# Altium PCB OBC_v8.PcbDoc (part 3 of 3)
Units mil, origin at the board's own origin, x right, y up, seen from the top; angles counter-clockwise.
Board outline 3550 x 3775 mil, 6 copper layers (Top Layer, MidLayer1, GND, Power, MidLayer2, Bottom Layer); 109 components, 228 nets, 761 pads, 520 vias.
Unrouted connection lines stored in the file: 5.
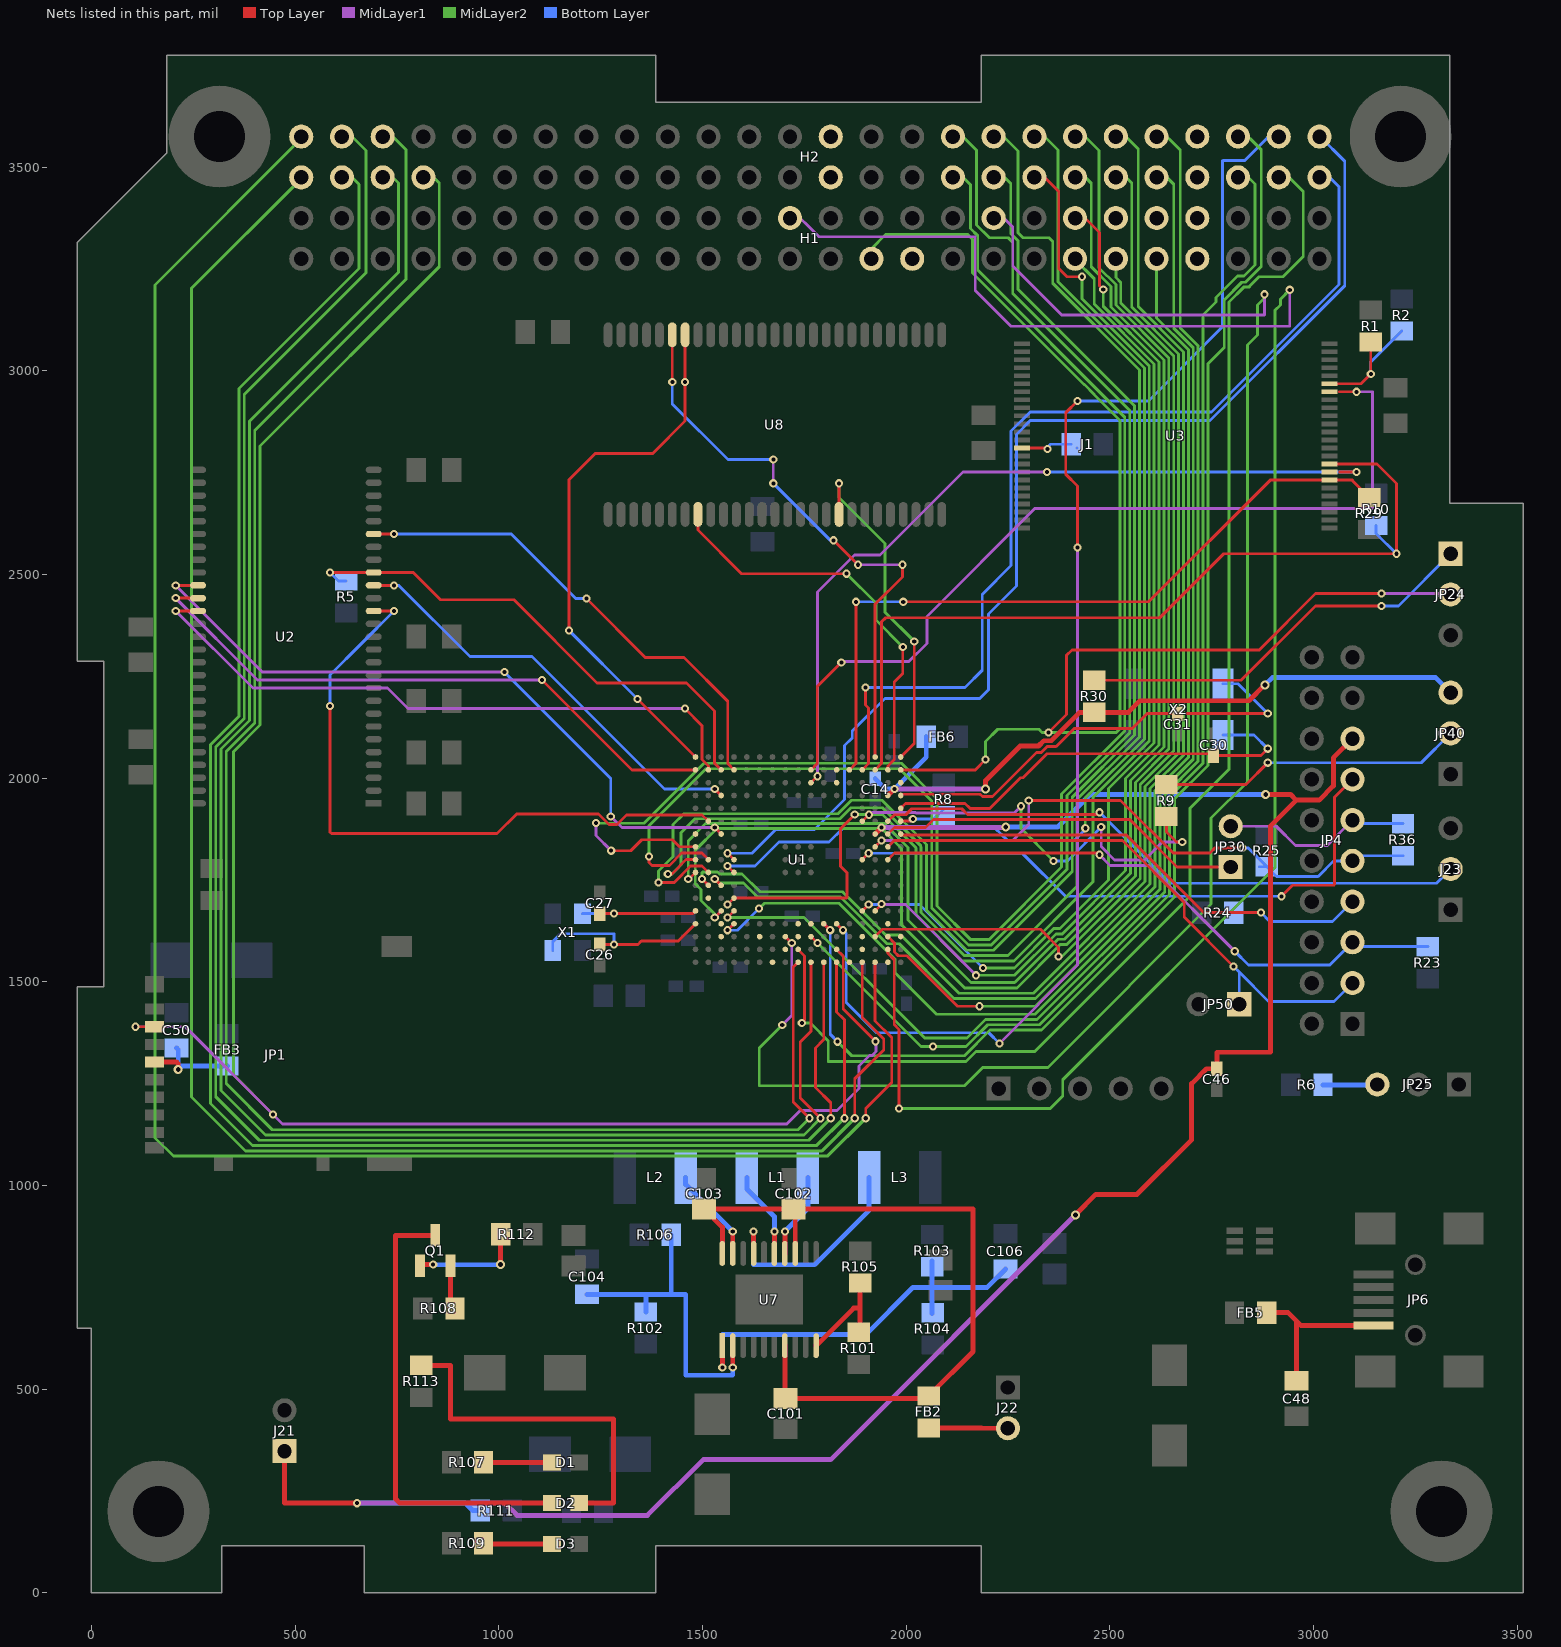
[diagram p7: the nets of this part, all layers, seen from the top]

## Via types
v1: diameter 20, hole 10, Top Layer to Bottom Layer, 405 vias
v2: diameter 22, hole 12, Top Layer to Bottom Layer, 93 vias
v3: diameter 20, hole 10, Top Layer to MidLayer1, 22 vias

## Nets (pads, with @x,y where several pads share a name; then routed paths per layer and width w, separated by ;. In a path a pad name is that pad's centre, name@x,y a point inside that pad or via, vN(x,y) a via of type N, cw(c..) or ccw(c..) an arc to the next point about the centre after c; other vN are vias at no path point) (continued)
IO41: H2.7 JP1.2 U1.T12 | length 4953.1
  Top Layer w7: v1(108,1389.69) JP1.2@155,1389.69 ; U1.T12@1829.49,1579.53 1845.59,1563.42 1845.59,1433 v1(1924.59,1354)
  MidLayer1 w7: v1(108,1389.69) 230.31,1389.69 v1(446,1174) 469,1151 1707,1151 1740,1184 1830,1184 1884.19,1238.19 1884.19,1293.22 1910.47,1319.5 1916.83,1319.5 1926.5,1329.17 1926.5,1352.09 v1(1924.59,1354)
  MidLayer2 w7: v1(446,1174) 348.31,1271.69 348.31,2064.77 414,2130.46 414,2815.57 854.03,3255.6 854.03,3460.97 H2.7@815,3500
IO42: H2.6 U1.U9 | length 4451.3
  Top Layer w7: U1.U9@1735,1548.03 1723,1536.03 1723,1205 v1(1763,1165)
  MidLayer2 w7: H2.6@715,3600 772,3543 772,3225 401,2854 401,2135.85 331,2065.85 331,1250 444,1137 1735,1137 v1(1763,1165)
IO43: H2.5 U1.U10 | length 4412.6
  Top Layer w7: U1.U10@1766.5,1548.03 1766.5,1378.5 1740,1352 1740,1215 v1(1790,1165)
  MidLayer2 w7: H2.5@715,3500 754.03,3460.97 754.03,3242.22 388,2876.19 388,2141.23 318,2071.23 318,1233 427,1124 1749,1124 v1(1790,1165)
IO44: H2.4 U1.U11 | length 4543
  Top Layer w7: U1.U11@1797.99,1548.03 1797.99,1358.33 1777.5,1337.83 1777.5,1240.5 1815,1203 v1(1815,1165)
  MidLayer2 w7: H2.4@615,3600 674,3541 674,3241 375,2942 375,2146.62 305,2076.62 305,1218 412,1111 1761,1111 v1(1815,1165)
IO45: H2.3 U1.U12 | length 4580.2
  Top Layer w7: U1.U12@1829.49,1548.03 1829.49,1426 1848.5,1406.99 v1(1848.5,1165)
  MidLayer2 w7: H2.3@615,3500 657,3458 657,3251.49 362,2956.49 362,2152 292,2082 292,1201 395,1098 1779.5,1098 ; v1@1846.5,1165 1779.5,1098 ; v1(1848.5,1165) 1781.5,1098 1779.5,1098
IO46: H2.2 U1.U15 | length 4991.8
  Top Layer w7: v1(1901,1165) 1901,1189 1964.97,1252.97 1964.97,1363.03 1923.98,1404.02 U1.U15@1923.98,1548.03
  MidLayer2 w7: H2.2@515,3600 515,3570.12 156.09,3211.21 156.09,1116.91 201,1072 1806,1072 ; v1@1899,1165 1806,1072 ; v1(1901,1165) 1808,1072 1806,1072
IO47: H2.1 U1.U14 | length 4657.6
  Top Layer w7: v1(1874,1165) 1874,1262 1945,1333 1945,1360 1892.48,1412.52 U1.U14@1892.48,1548.03
  MidLayer2 w7: H2.1@515,3500 515,3471.69 246,3202.69 246,1217 378,1085 1792,1085 ; v1@1872,1165 1792,1085 ; v1(1874,1165) 1794,1085 1792,1085
JTAGSEL: J23.2 U1.F16 | length 1489.2
  Top Layer w7: U1.F16@1955.47,1894.49 1971.22,1910.24 1999.24,1910.24 2014,1925 2136.5,1925 2151,1910.5 2469.26,1910.5 v1(2475,1916.24)
  Bottom Layer w7: v1(2475,1916.24) 2649.26,1741.97 3301.97,1741.97 J23.2@3337,1777
LED0: 
LED1: 
NANDOE: U1.C10 U3.8 | length 1962.6
  Top Layer w7: U1.C10@1766.5,1988.98 v1(1782.24,2004.72) ; 3064,2751.8 v1(3106,2751.8)
  MidLayer1 w7: v1(1782.24,2004.72) 1782.24,2457.24 1873,2548 1936.2,2548 2140,2751.8 v1(2345.85,2751.8)
  Bottom Layer w7: v1(2345.85,2751.8) v1(3106,2751.8)
NANDWE: U1.B10 U3.18 | length 2161.8
  Top Layer w7: U1.B10@1766.5,2020.47 1782,2035.98 1782,2225 v1(1841,2284) ; 3064,2948.65 v1(3106,2948.65)
  MidLayer1 w7: v1(1841,2284) 1843.5,2286.5 2006.5,2286.5 2051,2331 2051,2397 2316,2662 3145,2662 3145.35,2662.35 3145.35,2948.65 v1(3106,2948.65)
NBS1: U1.B2 U2.39 | length 1578
  Top Layer w7: v1(207,2410.44) U2.39@261.5,2410.44 ; v1(1457,2171) 1499.14,2128.86 1499.14,2045.59 1514.53,2030.2 U1.B2@1514.53,2020.47
  MidLayer1 w7: v1(207,2410.44) 396.44,2221 727.13,2221 777.13,2171 v1(1457,2171)
NBS3: U1.A1 U8.48 | length 1366.2
  Top Layer w7: v1(1172,2363) 1172,2732 1237,2797 1378,2797 1457.53,2876.53 v1(1457.53,2972.44) U8.48@1457.53,3088.47 ; v1(1341,2194) U1.A1@1483.03,2051.97
  Bottom Layer w7: v1(1172,2363) v1(1341,2194)
NetC34_2: 
NetC48_2: C48.2 FB5.2 JP6.1 | length 434.4
  Top Layer w12: FB5.2@2873.59,688 2938,688 2959,667 ; C48.2@2959,520.31 2959,667 ; JP6.1@3148,656 2970,656 2959,667
NetC50_2: C50.2 FB3.1 JP1.4 | length 252.7
  Top Layer w12: JP1.4@155,1303.08 209,1303.08 213,1299.08 v2(213,1285)
  Bottom Layer w12: C50.2@209,1337.69 213,1333.69 v2(213,1285) 221.63,1293.63 FB3.1@334,1293.63
NetC56_2: 
NetC57_2: 
NetC101_1: C101.1 C102.1 C103.1 FB2.2 U7.7 U7.13 U7.20 | length 1860.2
  Top Layer w12: U7.20@1548.84,833.19 1548.84,897.76 C103.1@1504,942.6 C102.1@1724,942.6 2164.41,942.6 2164.41,591.78 FB2.2@2056,483.37 2050.03,477.4 C101.1@1704,477.4 ; C101.1@1702.39,499.02 U7.7@1702.39,606.81 ; U7.13@1727.98,833.19 C102.1@1727.98,938.62
NetC104_1: C104.1 R102.2 R106.1 U7.2 | length 817.8
  Top Layer w12: v1(1574.43,553) U7.2@1574.43,606.81
  Bottom Layer w12: C104.1@1217,732.69 1361,732.69 ; R102.2@1361,689.37 1361,732.69 ; R106.1@1423.37,879 1423.37,733.32 1424,732.69 ; v1(1574.43,553) 1574.43,535 1573.43,534 1459,534 1459,732 1458.31,732.69 1424,732.69 ; 1361,732.69 1424,732.69
NetC106_1: C106.1 R103.1 R104.2 U7.1 | length 1025.3
  Top Layer w12: v1(1548.84,553) U7.1@1548.84,606.81
  Bottom Layer w12: v1(1548.84,553) 1548.84,634 1901,634 2017,750 2064,750 ; R104.2@2064,685.59 2064,750 ; R103.1@2064,814.41 R103.1@2064,800.63 2064,750 ; C106.1@2244,794.67 2199.33,750 2064,750
NetD1_2: D1.2 R107.2 | length 168.2
  Top Layer w12: R107.2@962.37,320 D1.2@1130.54,320
NetD2_1: D2.1 R113.1 | length 893.7
  Top Layer w12: R113.1@810,558.37 881.03,558.37 ; 881.4,558.37 881.4,426.4 1281.6,426.4 1281.6,220 D2.1@1197.46,220
NetD2_2: D2.2 Q1.3 | length 1132.9
  Top Layer w12: Q1.3@844,877.4 746.4,877.4 746.4,230.6 757,220 D2.2@1130.54,220
NetD3_2: D3.2 R109.2 | length 168.2
  Top Layer w12: R109.2@962.37,120 D3.2@1130.54,120
NetFB2_1: FB2.1 J22.2 | length 193.4
  Top Layer w12: FB2.1@2056,404.63 2184.96,404.63 ; 2185.59,404 J22.2@2250,404
NetJ1_1: J1.1 U3.38 | length 131.6
  Top Layer w7: U3.38@2284.09,2810.85 2345.85,2810.85 2347.5,2809.2 v1(2347.5,2808.37)
  Bottom Layer w7: v1(2347.5,2808.37) 2347.5,2809.2 2345.85,2810.85 2354.85,2819.85 J1.1@2405.63,2819.85
NetJP3_10: 
NetJP3_11: 
NetJP4_11: JP4.11 JP30.2 R36.1 | length 471.7
  MidLayer1 w7: JP30.2@2797,1882 2909.03,1882 2956,1835.03 3034.03,1835.03 JP4.11@3096,1897
  Bottom Layer w7: JP4.11@3096,1897 3104.63,1888.37 R36.1@3220,1888.37
NetJP24_1: JP24.1 R30.1 | length 1003.7
  Top Layer w7: R30.1@2462,2240.37 2822.37,2240.37 3005,2423 v1(3167,2423)
  Bottom Layer w7: v1(3167,2423) 3209,2423 JP24.1@3337,2551
NetJP25_3: JP25.3 R6.2 | length 132.6
  Bottom Layer w12: R6.2@3023.37,1247 JP25.3@3156,1247
NetJP40_2: JP40.2 R9.1 | length 750
  Top Layer w7: R9.1@2639,1984.37 2834.37,1984.37 v1(2888,2038)
  Bottom Layer w7: v1(2888,2038) 3265,2038 JP40.2@3337,2110
NetL1_1: L1.1 U7.14 | length 210.2
  Top Layer w12: U7.14@1702.39,833.19 v1(1702.39,887)
  Bottom Layer w12: v1(1702.39,887) 1758.8,943.42 L1.1@1758.8,1020
NetL1_2: L1.2 U7.15 | length 214.8
  Top Layer w12: U7.15@1676.8,833.19 v1(1676.8,887)
  Bottom Layer w12: L1.2@1609.2,1020 1609.2,991.39 1676.8,923.8 v1(1676.8,887)
NetL2_1: L2.1 U7.19 | length 234.7
  Top Layer w12: U7.19@1574.43,833.19 v1(1574.43,887)
  Bottom Layer w12: L2.1@1458.8,1020 1458.8,1002.63 v1(1574.43,887)
NetL3_1: L3.1 U7.17 | length 555.2
  Top Layer w12: U7.17@1625.61,833.19 v1(1625.61,887)
  Bottom Layer w12: v1(1625.61,887) 1625.61,805.39 1775.39,805.39 1909.2,939.2 L3.1@1909.2,1020
NetQ1_1: Q1.1 R112.2 | length 274.4
  Top Layer w12: Q1.1@806.6,802.6 810,806 v1(839,806) ; v2(1004.63,805.63) R112.2@1004.63,880
  Bottom Layer w12: v1(839,806) 840,805 840.41,805.41 v2@1004.63,805.41
NetQ1_2: Q1.2 R108.2 | length 88.7
  Top Layer w12: Q1.2@881.4,802.6 881.4,714.19 R108.2@881.59,714
NetR1_2: R1.2 R2.2 U3.19 | length 326
  Top Layer w7: U3.19@3040,2968.33 3117,2968.33 v1(3141,2992.33) R1.2@3141,3070.63
  Bottom Layer w7: v1(3141,2992.33) 3141,3021.63 R2.2@3217,3097.63
NetR101_2: R101.2 R105.1 U7.10 | length 291.8
  Top Layer w12: U7.10@1779.16,606.81 1871.35,699 1887,699 ; R101.2@1887,628.59 1887,699 ; R105.1@1887,774.41 1887,699
NRST: C46.2 J21.1 JP4.15 R111.1 U1.G15 | length 5412.1
  Top Layer w12: J21.1@474,348 474,220.87 474.87,220 v1(652,220) ; U1.G15@1923.98,1862.99 v3(1939.72,1878.74) ; v2(2416,928) 2466,978 2567,978 2701,1112 2701,1250 2737.59,1286.59 C46.2@2763,1286.59 2763,1327 2895,1327 2895,1883 2958,1946 ; v2(2883,1960) 2944,1960 2958,1946 ; JP4.15@3096,2097 3049,2050 3049,1981 3014,1946 2958,1946
  MidLayer1 w12: v1(652,220) 1015,220 1045,190 1365,190 1502,327 1815,327 v2(2416,928) ; v3(1939.72,1878.74) v2@2244.74,1878.74
  Bottom Layer w12: v1(652,220) 918,220 936,202 R111.1@954.63,202 ; v2(2244.74,1879.74) 2371.74,1879.74 2452,1960 v2(2883,1960)
NTRST: JP4.3 JP50.1 U1.H16 | length 1429.3
  Top Layer w7: U1.H16@1955.47,1831.5 1970.98,1847 2531,1847 2683,1695 2683,1659 v1(2804,1538)
  Bottom Layer w7: v1(2804,1538) 2818,1524 ; JP50.1@2818,1445 2818,1524 ; JP4.3@3096,1497 3051,1452 2890,1452 2818,1524
"OFF VCC": H1.31
OSCSEL: R9.2 U1.F14 | length 1090.3
  Top Layer w7: U1.F14@1892.48,1894.49 1892.98,1894.49 v3(1908.73,1910.24) ; R9.2@2639,1905.63 2639,1868 2664,1843 v1(2678,1843)
  MidLayer1 w7: v3(1908.73,1910.24) 1914.48,1915.99 2023.32,1915.99 2024.81,1914.5 2265.5,1914.5 v1(2282,1931) ; v1(2479,1880) 2479,1832 2512,1799 2585,1799 2629,1843 v1(2678,1843)
  MidLayer2 w7: v1(2282,1931) 2282,1877 v1(2362,1797)
  Bottom Layer w7: v1(2362,1797) 2396,1797 v1(2479,1880)
PA0: H2.47 U1.R10 | length 3045.9
  Top Layer w7: U1.R10@1766.5,1611.02 v1(1782.24,1595.28)
  MidLayer2 w7: v1(1782.24,1595.28) 2036.52,1341 v1(2066,1341) 2147.2,1341 2200.7,1394.5 2327.19,1394.5 2647,1714.31 2647,1771.08 2647,1954.5 2729,2036.5 2729,3137.46 2760.88,3169.34 2760.88,3180.17 2813.8,3233.09 2829.55,3233.09 2856.5,3260.04 2856.5,3458.5 H2.47@2815,3500
PA1: H2.48 U1.P11 | length 3315.7
  Top Layer w7: U1.P11@1797.99,1642.52 v1(1813.74,1626.77)
  MidLayer2 w7: v1(1832,1353) 1866.5,1318.5 2143.09,1318.5 2206.09,1381.5 2332.58,1381.5 2659.04,1707.96 2659,1708 2659,1776.05 2659,1949.53 2741,2031.53 2741,3017.57 2781,3057.57 2781,3174.31 2824.19,3217.5 2833.64,3217.5 2872,3255.86 2872,3543 H2.48@2815,3600
  Bottom Layer w7: v1(1813.74,1626.77) 1813.74,1371.26 v1(1832,1353)
PA2: H2.49 U1.T9 | length 3352.3
  Top Layer w7: U1.T9@1735,1579.53 1751,1563.53 1751,1406 v1(1744,1399)
  MidLayer2 w7: v1(1744,1399) 1765,1399 1809,1355 1809,1304 2146.97,1304 2172,1329.03 2316.03,1329.03 2697,1710 2697,1926 2793,2022 2793,3169.33 2829.17,3205.5 2842.31,3205.5 2843.5,3206.69 2843.5,3207.83 2866.67,3231 2925,3231 2975,3281 2975,3440 H2.49@2915,3500
PA3: H2.50 U1.P12 | length 3313.2
  Top Layer w7: U1.P12@1829.49,1642.52 v1(1845.24,1626.77) ; v1(2421,2566) 2421,2717 2392,2746 2392,2897 v1(2421,2926)
  MidLayer1 w7: v1(2229,1349) 2421,1541 v1(2421,2566)
  Bottom Layer w7: v1(1845.24,1626.77) 1853,1619.01 1853,1449 1927,1375 2203,1375 v1(2229,1349) ; v1(2421,2926) 2594.78,2926 2776.97,3108.19 2776.97,3515.75 2777.78,3516.56 2831.56,3516.56 H2.50@2915,3600
PA18: U1.U16
PA19: U1.U13
PA20: U1.T14
PA21: U1.R14 | length 0
PA22: H1.26 U1.T16 | length 4540.5
  Top Layer w7: U1.T16@1955.47,1579.53 1955.47,1569.8 1970.86,1554.41 1970.86,1394.86 1983,1382.72 v1(1983,1189)
  MidLayer1 w7: H1.26@1715,3400 1785.83,3329.17 2170,3329.17 2170,3197.38 2257.88,3109.5 2942,3109.5 v1(2942,3199)
  MidLayer2 w7: v1(1983,1189) 2354,1189 2384.54,1219.54 2384.54,1259.54 2906,1781 2906,3149 2919,3162 2919,3176 v1(2942,3199)
PA23: H1.41 U1.R15 | length 2417.8
  Top Layer w7: U1.R15@1923.98,1611.02 1941.89,1628.94 2329.71,1628.94 2374,1584.65 v1(2374,1562)
  MidLayer2 w7: v1(2374,1562) 2383.15,1562 2575,1753.85 2575,1984.32 2657,2066.32 2657,3036.76 2527,3166.76 2527,3216.94 2515,3228.94 H1.41@2515,3300
PA24: H1.43 U1.R16 | length 2493.5
  Top Layer w7: U1.R16@1955.47,1611.02 1971.58,1594.92 1971.58,1573.15 1980.59,1564.14 2002.36,1564.14 2126.5,1440 v1(2180,1440)
  MidLayer2 w7: v1(2180,1440) 2317.54,1440 2611,1733.46 2611,1756.17 2611,1969.41 2693,2051.41 2693,3051.68 2615,3129.68 H1.43@2615,3300
PA25: U1.P16
PA29: U1.R17
PA30: H1.40 U1.N15 | length 2546.3
  Top Layer w7: U1.N15@1923.98,1674.02 v3@1939.72,1689.76 ; H1.40@2415,3400 2475,3340 2475,3209 v1(2484,3200)
  MidLayer1 w7: v3@1939.72,1689.76 1998.24,1689.76 v1(2172,1516)
  MidLayer2 w7: v1(2172,1516) 2266.23,1516 2367.85,1617.62 2383.61,1617.62 2539,1773 2539,1999.23 2621,2081.24 2621,3021.85 2484,3158.85 v1(2484,3200)
  other v3: 1939.72,1690.76
PA31: H1.39 U1.N14 | length 2442.1
  Top Layer w7: U1.N14@1892.48,1674.02 v1(1908.23,1689.76)
  MidLayer2 w7: v1(2189,1534) 2265.85,1534 2362.46,1630.62 2378.23,1630.62 2497.31,1749.69 2497.31,1974.51 2609,2086.21 2609,3016.88 2462,3163.88 2462,3226 2415,3273 H1.39@2415,3300
  Bottom Layer w7: v1(1908.23,1689.76) 2033.24,1689.76 v1(2189,1534)
PB23: U1.R6 | length 0
PB25: U1.U7
PB26: H1.36 U1.R8 | length 4131.1
  Top Layer w7: U1.R8@1703.5,1611.02 v1(1719.25,1595.28)
  MidLayer1 w7: v1(1696,1394) 1719.25,1417.25 v1(1719.25,1595.28) ; H1.36@2215,3400 2262,3353 2262,3257.69 2382.19,3137.5 2880,3137.5 v1(2880,3188)
  MidLayer2 w7: v1(1696,1394) 1639.5,1337.5 1639.5,1245 2143.13,1245 2188.15,1290.03 2348.03,1290.03 2749,1691 2749,1902 2838,1991 2838,3063.66 2862.75,3088.42 2862.75,3161.75 2880,3179 v1(2880,3188)
PB28: U1.R9
PB29: U1.T8
PB30: U1.P9
PB31: U1.P10
PC4: U1.A17 U8.19 | length 838.6
  Top Layer w7: U8.19@1835.48,2647.53 v1(1835.48,2724) ; U1.A17@1986.97,2051.97 2020,2085 v1(2020,2336)
  MidLayer2 w7: v1(1835.48,2724) 1835.48,2689 1948.48,2576 1948.48,2407.52 v1(2020,2336)
PC5: U1.A15 U8.49 | length 1432.1
  Top Layer w7: v1(1426.03,2972.44) U8.49@1426.03,3088.47 ; v1(1822,2584) v3(1882,2524) ; U1.A15@1923.98,2051.97 1923.98,2426.98 1991.14,2494.14 ; 1991,2494.28 v1(1991,2524)
  MidLayer1 w7: v1(1674,2724) v1(1674,2782) ; v3(1882,2524) v1(1991,2524)
  Bottom Layer w7: v1(1426.03,2972.44) 1426.03,2918.46 1562.49,2782 v1(1674,2782) ; v1(1674,2724) 1814,2584 v1(1822,2584)
PC8: U1.B16 U8.8 | length 999.7
  Top Layer w7: U8.8@1489.02,2647.53 1489.02,2608.98 1596,2502 1655,2502 ; 1657,2502 v1(1854,2502) ; U1.B16@1955.47,2020.47 1955.47,2030.2 1970.86,2045.59 1970.86,2236 1992,2257.14 v1(1992,2322)
  MidLayer2 w7: v1(1854,2502) 1926,2430 1926,2388 v1(1992,2322)
PC10: U1.B12
PC11: H2.51 U1.B14 | length 2395.1
  Top Layer w7: U1.B14@1892.48,2020.47 1908,2035.99 1908,2172 1900,2180 v1(1900,2223)
  Bottom Layer w7: v1(1900,2223) 2145,2223 2187,2265 2187,2451 2258,2522 2258,2852 2305,2899 2750.03,2899 3063,3211.97 3063,3452 H2.51@3015,3500
PC12: U1.C12 | length 0
PC13: R29.2 U1.B13 U3.7 | length 1820.5
  Top Layer w7: U1.B13@1860.98,2020.47 1877,2036.49 v1(1877,2433) ; v1@1994.59,2433 2595.59,2433 2894.11,2731.52 2894.11,2732.11 U3.7@3040,2732.11 3096,2732.11 3096,2730.37 R29.2@3137,2689.37
  Bottom Layer w7: v1(1877,2433) v1(1993,2433)
PC14: R10.2 U1.B15 U3.9 | length 2150
  Top Layer w7: U1.B15@1923.98,2020.47 1940,2036.5 1940,2384 1950,2394 2623,2394 2780,2551 v1(3204,2551) 3204,2723.41 3155.93,2771.48 U3.9@3040,2771.48
  Bottom Layer w7: R10.2@3154,2620.63 3154,2601 v1(3204,2551)
PC15: U1.G1
PC16: H2.52 U1.J4 | length 2945.4
  Top Layer w7: v1(1561.77,1815.75) U1.J4@1577.52,1800
  Bottom Layer w7: v1(1561.77,1815.75) 1621.75,1815.75 1680,1874 1775,1874 1849,1948 1849,2080 1868,2099 1868,2116 1948,2196 2181,2196 2202,2217 2202,2403 2271,2472 2271,2844 2305,2878 2746,2878 3077,3209 3077,3514.54 3015,3576.54 H2.52@3015,3600
PC17: H2.34 U1.J2 | length 3845.9
  Top Layer w7: v1(1369,1808) 1369,1793 1376,1786 1419,1786 1449,1816 1498.53,1816 U1.J2@1514.53,1800
  MidLayer2 w7: v1(1369,1808) 1369,1883.33 1508.85,2023.17 1983.44,2023.17 2063,1943.62 2063,1681.08 2153.58,1590.5 2209.12,1590.5 2395,1776.38 2395,1957.06 2549,2111.06 2549,2902.77 2262,3189.77 2262,3315.52 2250.75,3326.77 2204.72,3326.77 2173.23,3358.27 2173.23,3541.77 H2.34@2115,3600
PC18: H2.33 U1.H1 | length 3877.2
  Top Layer w7: v1(1276,1822) 1324,1822 1351,1849 1426.5,1849 1444,1831.5 U1.H1@1483.03,1831.5
  MidLayer1 w7: v1(1239,1890) 1239,1859 v1(1276,1822)
  MidLayer2 w7: v1(1239,1890) 1239.5,1889.5 1356.79,1889.5 1503.88,2036.59 1988.41,2036.59 2076,1949 2076,1686.46 2158.96,1603.5 2203.73,1603.5 2382,1781.77 2382,1961.03 2537,2116.03 2537,2886.23 2175.97,3247.26 2175.97,3331.9 2158,3349.87 2158,3457 H2.33@2115,3500
PC19: H2.36 U1.J1 | length 3631.6
  Top Layer w7: v1(1415,1765) 1425,1765 1460,1800 U1.J1@1483.03,1800
  MidLayer2 w7: v1(1415,1765) 1425,1765 1447,1787 1447,1866 1481.5,1900.5 1837.76,1900.5 1864.76,1927.5 1942.47,1927.5 2036,1833.97 2036,1832 2037,1831 2037,1670.31 2142.81,1564.5 2249.83,1564.5 2420,1734.67 2420,1948.12 2573,2101.12 2573,3001.97 2360,3214.97 2360,3318 2351.23,3326.77 2287.4,3326.77 2275,3339.17 2275,3540 H2.36@2215,3600
PC20: H2.35 U1.K2 | length 3569.2
  Top Layer w7: v1(1392,1744) 1431,1744 1471,1784 1499.03,1784 U1.K2@1514.53,1768.5
  MidLayer2 w7: v1(1392,1744) 1392,1772 1428,1808 1428,1886 1454.5,1912.5 1832.77,1912.5 1866,1945.73 1941.27,1945.73 2050,1837 2050,1675.69 2148.19,1577.5 2214.5,1577.5 2408,1771 2408,1953.09 2561,2106.09 2561,2914.39 2275,3200.39 2275,3319.49 2257,3337.49 2257,3459.97 H2.35@2216.97,3500
PC21: H2.38 U1.K4 | length 3161
  Top Layer w7: v1(1561.77,1784.25) U1.K4@1577.52,1768.5
  MidLayer2 w7: H2.38@2315,3600 2373,3542 2373,3218.94 2585,3006.94 2585,2096.15 2440,1951.15 v1(2440,1877) v1@2440,1874
  Bottom Layer w7: v1(1561.77,1784.25) 1629.25,1784.25 1688,1843 1811,1843 1844,1876 1958,1876 ; 2233.25,1862.74 2219.99,1876 1958,1876 ; 2235,1861.24 2249.49,1846.75 ; v1@2440,1874 2412.75,1846.75 2249.49,1846.75 ; 1958,1876 1987.25,1846.75 2249.49,1846.75
PC22: H2.37 U1.M4 | length 3385.5
  Top Layer w7: v1(1561.77,1689.76) U1.M4@1577.52,1705.51 1853,1705.51 1854.74,1707.26 1854.74,1768 1839,1783.74 1839,1876 v1(1874,1911) ; H2.37@2315,3500 2375,3440 2375,3250.98 2394.98,3231 v1(2432,3231)
  MidLayer2 w7: v1(1874,1911) 1942,1911 2024,1829 2024,1664.92 2137.42,1551.5 2264.96,1551.5 2458.5,1745.04 2458.5,1952.68 2597,2091.18 2597,3011.91 2432,3176.91 v1(2432,3231)
PC23: H2.40 U1.N3 | length 3664.8
  Top Layer w7: v1(1530.28,1658.27) U1.N3@1546.02,1674.02
  MidLayer2 w7: v1(1530.28,1658.27) 1530.28,1666.43 1496.71,1700 1496.71,1726.57 1482.28,1741 1482.28,1823 1535.78,1876.5 1940.12,1876.5 1989,1827.62 1989,1640 2144,1485 2272,1485 2378.62,1591.62 2394.38,1591.62 2563,1760.23 2563,1989.29 2645,2071.3 2645,3031.79 2515,3161.79 2515,3211.97 2474,3252.97 2474,3541 H2.40@2415,3600
PC24: H2.39 U1.K1 | length 3455.8
  Top Layer w7: v1(1465.28,1752.76) 1467.28,1752.76 U1.K1@1483.03,1768.5
  MidLayer2 w7: v1(1465.28,1752.76) 1465.28,1846 1507.78,1888.5 1946.5,1888.5 2005,1830 2005,1652 2159,1498 2266.62,1498 2373.23,1604.62 2389,1604.62 2551,1766.62 2551,1994.26 2633,2076.27 2633,3026.82 2503,3156.82 2503,3207 2454.5,3255.5 2454.5,3460.5 H2.39@2415,3500
PC25: H2.42 U1.L3 | length 3291.9
  Top Layer w7: v1(1530.28,1752.76) U1.L3@1546.02,1737.01
  MidLayer2 w7: v1(1530.28,1752.76) 1540.02,1743.02 1600.6,1743.02 1635.62,1708 1838.64,1708 1953,1593.64 1983.36,1593.64 2118,1459 2318.15,1459 2599,1739.85 2599,1751.2 2599,1974.38 2681,2056.38 2681,3046.7 2570,3157.7 2570,3545 H2.42@2515,3600
PC26: H2.41 U1.L2 | length 3214.9
  Top Layer w7: v1@1498.54,1753 v1(1498.78,1752.76) U1.L2@1514.53,1737.01
  MidLayer2 w7: v1(1498.78,1752.76) 1498.78,1768.04 1500,1769.26 1537.11,1769.26 1541.61,1764.76 1597.24,1764.76 1641,1721 1844.02,1721 1950,1615.02 1986.98,1615.02 2130,1472 2312.77,1472 2587,1746.23 2587,1979.35 2669,2061.35 2669,3041.73 2554.03,3156.71 2554.03,3460.97 H2.41@2515,3500
PC27: H2.44 U1.N4 | length 3322.3
  Top Layer w7: v1(1561.77,1658.27) U1.N4@1577.52,1674.02
  MidLayer2 w7: v1(1561.77,1658.27) 1749.73,1658.27 2046,1362 2149.5,1362 2195,1407.5 2321.81,1407.5 2635,1720.69 2635,1766.11 2635,1959.47 2717,2041.47 2717,3061.62 2673,3105.62 2673,3542 H2.44@2615,3600
PC28: H2.43 U1.P4 | length 3214.4
  Top Layer w7: v1(1561.77,1626.77) U1.P4@1577.52,1642.52
  MidLayer2 w7: v1(1639,1680) 1652,1693 1835.25,1693 1973.25,1555 1973.25,1521.75 2074.5,1420.5 2316.42,1420.5 2623,1727.08 2623,1761.14 2623,1964.44 2705,2046.44 2705,3056.65 2657,3104.65 2657,3458 H2.43@2615,3500
  Bottom Layer w7: v1(1561.77,1626.77) 1585.77,1626.77 v1(1639,1680)
PC29: U1.R3
PC30: U1.P3
PC31: U1.M2
RAS: U1.D3 U2.18 | length 1066.7
  Top Layer w7: U2.18@693,2473.43 v1(743,2473.43) ; v1(1530.28,1973.23) U1.D3@1546.02,1957.48
  Bottom Layer w7: v1(743,2473.43) 754.57,2473.43 929.59,2298.41 1081.59,2298.41 1406.77,1973.23 v1(1530.28,1973.23)
RD+: 
RD-: 
REXT: 
RSVD0: H1.44
RSVD1: H1.45
RSVD2: H1.46
RTCK: JP30.1 U1.G16 | length 904.5
  Top Layer w7: U1.G16@1955.47,1862.99 1971.48,1879 2048,1879 2067.5,1898.5 2549,1898.5 2665.5,1782 JP30.1@2797,1782
SDA10: U1.B4 U2.22 | length 1214
  Top Layer w7: U2.22@693,2599.42 v1(743,2599.42) ; v1(1215,2441) 1359.73,2296.27 1454.73,2296.27 1562.13,2188.87 1562.13,2035.86 U1.B4@1577.52,2020.47
  Bottom Layer w7: v1(743,2599.42) 1030.58,2599.42 1189,2441 v1(1215,2441)
SDCK: U1.B1 U2.38 | length 1503.4
  Top Layer w7: v1(207,2441.94) U2.38@261.5,2441.94 ; v1(1106,2241) 1106.34,2241 1326.86,2020.47 ; 1328.53,2020.47 U1.B1@1483.03,2020.47
  MidLayer1 w7: v1(207,2441.94) 407.94,2241 v1(1106,2241)
SDCKE: U1.G3 U2.37 | length 1701.2
  Top Layer w7: v1(207,2473.43) U2.37@261.5,2473.43 ; v3(1530.28,1878.74) U1.G3@1546.02,1862.99
  MidLayer1 w7: v1(207,2473.43) 419.43,2261 v1(1014,2261) ; v1(1275,1906) 1302.26,1878.74 v3(1530.28,1878.74)
  Bottom Layer w7: v1@1013.5,2260.5 1275,1999 v1(1275,1906)
SDCS: R5.2 U1.B3 U2.19 | length 1284.6
  Top Layer w7: v1(585.9,2504.93) 790.07,2504.93 857,2438 1037,2438 1241.12,2233.88 1461.12,2233.88 1530,2165 1530,2036.5 U1.B3@1546.02,2020.47
  Bottom Layer w7: v1(585.9,2504.93) 606.46,2484.37 R5.2@625,2484.37 ; R5.2@625,2505.59 R5.2@625.66,2504.93
SDWE: U1.F2 U2.16 | length 1635.3
  Top Layer w7: v1(585.9,2177) 585.9,1867.1 589,1864 996,1864 1044,1912 1245,1912 1271,1886 1290,1886 1314,1910 1499.02,1910 U1.F2@1514.53,1894.49 ; U2.16@693,2410.44 v1(743,2410.44)
  Bottom Layer w7: v1(585.9,2177) 585.9,2253.34 662.56,2330 v1(743,2410.44)
SHDN: U1.C17
TCK: JP4.9 R25.1 R36.2 U1.H15 | length 1505.3
  Top Layer w7: U1.H15@1923.98,1831.5 v1(1939.72,1847.24) ; v1(2301.24,1945.24) 2526.23,1945.24 2538.74,1932.74 2539,1933 2656,1816 2746,1816 2759,1829 v1(2826,1829)
  MidLayer1 w7: v1(1939.72,1847.24) 2262,1847.24 2301.24,1886.49 v1(2301.24,1945.24)
  Bottom Layer w7: v1(2826,1829) 2839.63,1829 R25.1@2886,1782.63 ; R25.1@2867.37,1782.63 R25.1@2886,1782.63 ; R36.2@3220,1809.63 3108.63,1809.63 JP4.9@3096,1797 3049.78,1797 3011.75,1758.97 2909.66,1758.97 R25.1@2886,1782.63
TD+: 
TD-: 
TDI: JP4.5 R23.1 U1.J16 | length 1473.7
  Top Layer w7: U1.J16@1955.47,1800 1971.47,1816 2471,1816 v1(2475,1812)
  MidLayer1 w7: v1(2475,1812) 2501,1786 2596,1786 v1(2807,1575)
  Bottom Layer w7: v1(2807,1575) 2841,1541 3040,1541 JP4.5@3096,1597 3106.63,1586.37 R23.1@3281,1586.37
TDO: JP4.13 U1.J14 | length 1498.1
  Top Layer w7: U1.J14@1892.48,1800 v1(1908.23,1815.75) ; v1(2922,1710) 2949,1737 3050,1737 3052,1739 3052,1953 JP4.13@3096,1997
  Bottom Layer w7: v1(1908.23,1815.75) 2285.25,1815.75 2391,1710 v1(2922,1710)
TMS: JP4.7 R24.1 U1.G17 | length 1285
  Top Layer w7: U1.G17@1986.97,1862.99 1989.46,1860.5 2540.5,1860.5 2731,1670 v1(2871,1670)
  Bottom Layer w7: R24.1@2804.37,1670 v1(2871,1670) 2893,1648 3047,1648 JP4.7@3096,1697
TST: R8.2 U1.F17 | length 118.5
  Top Layer w7: U1.F17@1986.97,1894.49 2011.49,1894.49 v1(2016.49,1899.49)
  Bottom Layer w7: v1(2016.49,1899.49) 2067.86,1899.49 R8.2@2093,1924.63
VBACKUP: H1.42
VBATT: H2.45 H2.46
"VCC SYS": H2.27 H2.28
VDDBU: C14.2 FB6.2 JP40.3 R30.2 U1.D16 | length 1747.8
  Top Layer w12: U1.D16@1955.47,1957.48 v1(1971.22,1973.23) ; v2(2195,1973.23) 2195,1994 2280,2079 2325,2079 2338,2092 2356.87,2092 2426.5,2161.63 R30.2@2462,2161.63 2545.63,2161.63 2574,2190 2842,2190 v2(2881,2229)
  MidLayer1 w12: v1(1971.22,1973.23) v2(2195,1973.23)
  Bottom Layer w12: C14.2@1924.18,1998.82 1949.77,1973.23 v1(1971.22,1973.23) 2049.63,2051.64 FB6.2@2049.63,2102 ; v2(2881,2229) 2899,2247 3300,2247 JP40.3@3337,2210
WKUP: H1.29 JP24.2 U1.B17 | length 3446.5
  Top Layer w7: U1.B17@1986.97,2020.47 2170,2020.47 v1(2195,2045.47) ; v1(2350,2112) 2394,2156 2394,2302 2407,2315 2867,2315 3005,2453 v1(3167,2453)
  MidLayer1 w7: v1(3167,2453) 3335,2453 JP24.2@3337,2451
  MidLayer2 w7: H1.29@1915,3300 1949.65,3334.65 2151.35,3334.65 2162.97,3323.03 2162.97,3240.57 2437.04,2966.5 2437.78,2966.5 2461.5,2942.78 2461.5,2942.04 2525,2878.54 2525,2121 2516,2112 v1(2350,2112) 2334,2112 2326,2120 2225,2120 2195,2090 v1(2195,2045.47)
XI: 
XIN: C27.2 U1.N1 X1.1 | length 315.4
  Top Layer w7: C27.2@1248,1667.41 v1(1283,1667.41) 1476.43,1667.41 U1.N1@1483.03,1674.02
  Bottom Layer w7: X1.1@1205.42,1667.28 1205.55,1667.41 v1(1283,1667.41)
XIN32: C31.2 U1.D17 X2.4 | length 1129.3
  Top Layer w7: U1.D17@1986.97,1957.48 1989.99,1960.5 2181.57,1960.5 2187.34,1954.73 2212,1954.73 2320.27,2063 2332,2063 2346.5,2077.5 2368.5,2077.5 2413,2122 2555.41,2122 2592,2158.59 C31.2@2667,2158.59 v1(2888,2158.59)
  Bottom Layer w7: X2.4@2778.27,2231.99 2814.6,2231.99 v1(2888,2158.59)
XO: 
XOUT: C26.2 U1.P1 X1.3 | length 462.9
  Top Layer w7: C26.2@1248,1591.59 v1(1283,1591.59) 1341.59,1591.59 1350,1600 1440.51,1600 U1.P1@1483.03,1642.52
  Bottom Layer w7: X1.3@1132.58,1576.72 1132.58,1598.58 1152,1618 1283,1618 v1(1283,1591.59)
XOUT32: C30.2 U1.E17 X2.1 | length 1099.1
  Top Layer w7: U1.E17@1986.97,1925.98 1998.98,1938 2144.98,1938 2157,1925.98 2205.98,1925.98 2281,2001 2286.97,2001 2345.97,2060 2750.41,2060 C30.2@2755,2055.41 2871,2055.41 v1(2888,2072.41)
  Bottom Layer w7: X2.1@2778.27,2106.01 2854.4,2106.01 v1(2888,2072.41)
pads on no net: JP1.C1 JP1.C2 JP1.C3 JP1.C4 JP1.C5 JP1.C6 JP4.2 JP4.17 JP4.19 JP5.2 JP6. JP6.4 U1.A12 U1.A13 U1.A14 U1.C15 U1.D15 U1.R1 U1.T1 U2.40 U3.1 U3.2 U3.3 U3.4 U3.5 U3.6 U3.10 U3.11 U3.14 U3.15 U3.20 U3.21 U3.22 U3.23 U3.24 U3.25 U3.26 U3.27 U3.28 U3.33 U3.34 U3.35 U3.39 U3.40 U3.45 U3.46 U3.47 U3.48 U8.1 U8.25 U8.26 U8.27 U8.28 U8.29 U8.30 U8.36 U8.54 X2.2 X2.3

## Polygon pours and split planes (outlines as drawn)
AGND on GND (split plane): 3314.9,2675 3315.29,2671.08 3316.43,2667.31 3318.29,2663.83 3320.79,2660.79 3323.83,2658.29 3327.31,2656.43 3331.08,2655.29 3335,2654.9 3494.9,2654.9 3494.9,20.1 2205.1,20.1 2205.1,115 2204.71,118.92 2203.57,122.69 2201.71,126.17 2199.21,129.21 2196.17,131.71 2192.69,133.57 2188.92,134.71 2185,135.1 1385,135.1 1381.08,134.71 1377.31,133.57 1373.83,131.71 1370.79,129.21 1368.29,126.17 1366.43,122.69 1365.29,118.92 1364.9,115 1364.9,20.1 690.1,20.1 690.1,115 689.71,118.92 688.57,122.69 686.71,126.17 684.21,129.21 681.17,131.71 677.69,133.57 673.92,134.71 670,135.1 320,135.1 316.08,134.71 312.31,133.57 308.83,131.71 305.79,129.21 303.29,126.17 301.43,122.69 300.29,118.92 299.9,115 299.9,20.1 20.1,20.1 20.1,650 19.71,653.92 18.57,657.69 16.71,661.17 14.21,664.21 11.17,666.71 7.69,668.57 3.92,669.71 0,670.1 -14.9,670.1 -14.9,1467.4 30,1467.4 33.92,1467.79 37.69,1468.93 41.17,1470.79 44.21,1473.29 46.71,1476.33 48.57,1479.81 49.71,1483.58 50.1,1487.5 50.1,2287.5 49.71,2291.42 48.57,2295.19 46.71,2298.67 44.21,2301.71 41.17,2304.21 37.69,2306.07 33.92,2307.21 30,2307.6 -14.9,2307.6 -14.9,3306.68 199.21,3520.79 201.71,3523.83 203.57,3527.31 204.71,3531.08 205.1,3535 205.1,3754.9 1364.9,3754.9 1364.9,3660 1365.29,3656.08 1366.43,3652.31 1368.29,3648.83 1370.79,3645.79 1373.83,3643.29 1377.31,3641.43 1381.08,3640.29 1385,3639.9 2185,3639.9 2188.92,3640.29 2192.69,3641.43 2196.17,3643.29 2199.21,3645.79 2201.71,3648.83 2203.57,3652.31 2204.71,3656.08 2205.1,3660 2205.1,3754.9 3314.9,3754.9
1V on Power (split plane): 2253.94,1952.5 2254.07,1951.5 2253.94,1950.5 2254.19,1948.54 2254.95,1946.72 2256.15,1945.15 2384.44,1816.87 2384.44,1480.13 2046.87,1142.56 1265.56,1142.56 1265.56,1414 1265.56,1751.44 1506.87,1751.44 1522.44,1735.87 1522.44,1683 1522.69,1681.04 1523.45,1679.22 1524.65,1677.65 1526.22,1676.45 1528.04,1675.69 1530,1675.44 1568.87,1675.44 1631.65,1612.65 1646.65,1597.65 1648.22,1596.45 1648.97,1596.14 1650.04,1595.69 1652,1595.44 1947.44,1595.44 1947.44,1497 1947.69,1495.04 1948.45,1493.22 1949.65,1491.65 1951.22,1490.45 1953.04,1489.69 1955,1489.44 2111,1489.44 2112.96,1489.69 2114.78,1490.45 2116.35,1491.65 2117.55,1493.22 2118.31,1495.04 2118.56,1497 2118.5,1497.5 2118.56,1498 2118.56,1795 2118.31,1796.96 2117.55,1798.78 2116.35,1800.35 2114.78,1801.55 2112.96,1802.31 2111,1802.56 1859.13,1802.56 1775.35,1886.35 1773.78,1887.55 1773.03,1887.86 1771.96,1888.31 1770,1888.56 1694.56,1888.56 1694.56,1950 1694.56,2008.44 1777.44,2008.44 1777.44,1948 1777.69,1946.04 1778.45,1944.22 1779.65,1942.65 1781.22,1941.45 1783.04,1940.69 1785,1940.44 2043,1940.44 2044.96,1940.69 2046.03,1941.14 2046.78,1941.45 2048.35,1942.65 2064.35,1958.65 2065.55,1960.22 2066.31,1962.04 2066.34,1962.27 2066.56,1964 2066.56,2172.44 2253.94,2172.44
3V3 on Power (split plane): 3314.9,2675 3315.29,2671.08 3316.43,2667.31 3318.29,2663.83 3320.79,2660.79 3323.83,2658.29 3327.31,2656.43 3331.08,2655.29 3335,2654.9 3494.9,2654.9 3494.9,20.1 2205.1,20.1 2205.1,115 2204.71,118.92 2203.57,122.69 2201.71,126.17 2199.21,129.21 2196.17,131.71 2192.69,133.57 2188.92,134.71 2185,135.1 1385,135.1 1381.08,134.71 1377.31,133.57 1373.83,131.71 1370.79,129.21 1368.29,126.17 1366.43,122.69 1365.29,118.92 1364.9,115 1364.9,20.1 690.1,20.1 690.1,115 689.71,118.92 688.57,122.69 686.71,126.17 684.21,129.21 681.17,131.71 677.69,133.57 673.92,134.71 670,135.1 320,135.1 316.08,134.71 312.31,133.57 308.83,131.71 305.79,129.21 303.29,126.17 301.43,122.69 300.29,118.92 299.9,115 299.9,20.1 20.1,20.1 20.1,650 19.71,653.92 18.57,657.69 16.71,661.17 14.21,664.21 11.17,666.71 7.69,668.57 3.92,669.71 0,670.1 -14.9,670.1 -14.9,1467.4 30,1467.4 33.92,1467.79 37.69,1468.93 41.17,1470.79 44.21,1473.29 46.71,1476.33 48.57,1479.81 49.71,1483.58 50.1,1487.5 50.1,2287.5 49.71,2291.42 48.57,2295.19 46.71,2298.67 44.21,2301.71 41.17,2304.21 37.69,2306.07 33.92,2307.21 30,2307.6 -14.9,2307.6 -14.9,3306.68 199.21,3520.79 201.71,3523.83 203.57,3527.31 204.71,3531.08 205.1,3535 205.1,3754.9 1364.9,3754.9 1364.9,3660 1365.29,3656.08 1366.43,3652.31 1368.29,3648.83 1370.79,3645.79 1373.83,3643.29 1377.31,3641.43 1381.08,3640.29 1385,3639.9 2185,3639.9 2188.92,3640.29 2192.69,3641.43 2196.17,3643.29 2199.21,3645.79 2201.71,3648.83 2203.57,3652.31 2204.71,3656.08 2205.1,3660 2205.1,3754.9 3314.9,3754.9

## Other copper
Power (plane layer: these items are gaps in the copper):
  lines w10: 1258,1136 1259,1135 ; 1686,2016 1687,2015 ; 1785,2015 1786,2016
  lines w15: 1258,1136 1258,1414 1258,1759 1510,1759 1530,1739 1530,1683 1572,1683 1637,1618 1652,1603 1955,1603 1955,1497 2111,1497 ; 1259,1135 1740,1135 2050,1135 2392,1477 2392,1820 2261.5,1950.5 ; 1686,2016 1786,2016 ; 1687,2015 1687,1950 1687,1881 1770,1881 1856,1795 2111,1795 2111,1498 ; 1785,2015 1785,1948 1889,1948 2043,1948 2059,1964 2059,2180 2261.5,2180 2261.5,1952.5

## Silkscreen, mask and mechanical layers (free items; w line width, h text height)
Top Overlay:
  text "VDDBU" at 3435,2514 h25 r90
  text "WKUP" at 3435,2404 h25 r90
  text "GND" at 3435,2309 h25 r90
  text "VDDBU" at 3435,2157 h25 r90
  text "RST" at 3167,2082 h35
  text "OSC" at 3435,2071 h25 r90
  text "TDO" at 3167,1980 h35
  text "GND" at 3435,1969 h25 r90
  text "RTK" at 2764,1953 h25
  text "RTK" at 3167,1880 h35
  text "1V" at 3435,1861 h25 r90
  text "TCK" at 3167,1779 h35
  text "JTAG" at 3435,1730 h25 r90
  text "TMS" at 3167,1680 h35
  text "GND" at 3435,1643 h25 r90
  text "TDI" at 3167,1580 h35
  text "3V3" at 2610,1490 h35 r270
  text "NTRST" at 3167,1478 h35
  text "Vref" at 3167,1376 h35
  text "NTRST" at 2688,1339 h35
  text "3V3" at 3123,1150 h25
  text "BMS" at 3225,1150 h25
  text "GND" at 3328,1150 h25
  text "NC" at 2342,1100.13 h35 r90
  text "GND" at 2244,1065.15 h35 r90
  text "DRXD" at 2544,1030.16 h35 r90
  text "DTXD" at 2648,1030.16 h35 r90
  text "Vmain" at 2439,1001 h35 r90
  text "YUsend" at 163,878 h35
  text "OBC Prototype" at 163,801 h35
  text "Revision B" at 163,723 h35
  text "Power" at 2369,366 h40 r90
  text "Reset" at 398,312 h40 r90
Mechanical 2:
  lines w10: -35,650 0,650 0,0 320,0 320,115 670,115 670,0 1385,0 1385,115 2185,115 2185,0 3515,0 3515,2675 3335,2675 3335,3775 2185,3775 2185,3660 1385,3660 1385,3775 185,3775 185,3535 -35,3315 -35,3250 -35,2287.5 30,2287.5 30,1487.5 -35,1487.5 -35,650
Drill Drawing:
  text ".LEGEND" at 3715,200 h60
  text "Drill Drawing." at 3715,100 h60

## Dimensions
0,0 to 3515,0 on Mechanical 1
0,0 to 185,3775 on Mechanical 1

## Text inside footprints (layer, text, board x,y; h text height)
D1: Top Overlay "A" at 1254,283 h35; Top Overlay "C" at 1051,283 h35
D2: Top Overlay "A" at 1254,179 h35; Top Overlay "C" at 1051,179 h35
D3: Top Overlay "A" at 1254,85 h35; Top Overlay "C" at 1051,85 h35
X2: Bottom Overlay "1" at 2761.54,2024.31 h35 r270; Bottom Overlay "2" at 2545.98,2024.31 h35 r270; Bottom Overlay "3" at 2545,2291.05 h35 r270; Bottom Overlay "4" at 2761.54,2291.05 h35 r270